# EAGLE board 4brar07_Audio_Amplifier (EAGLE 9.6.2)
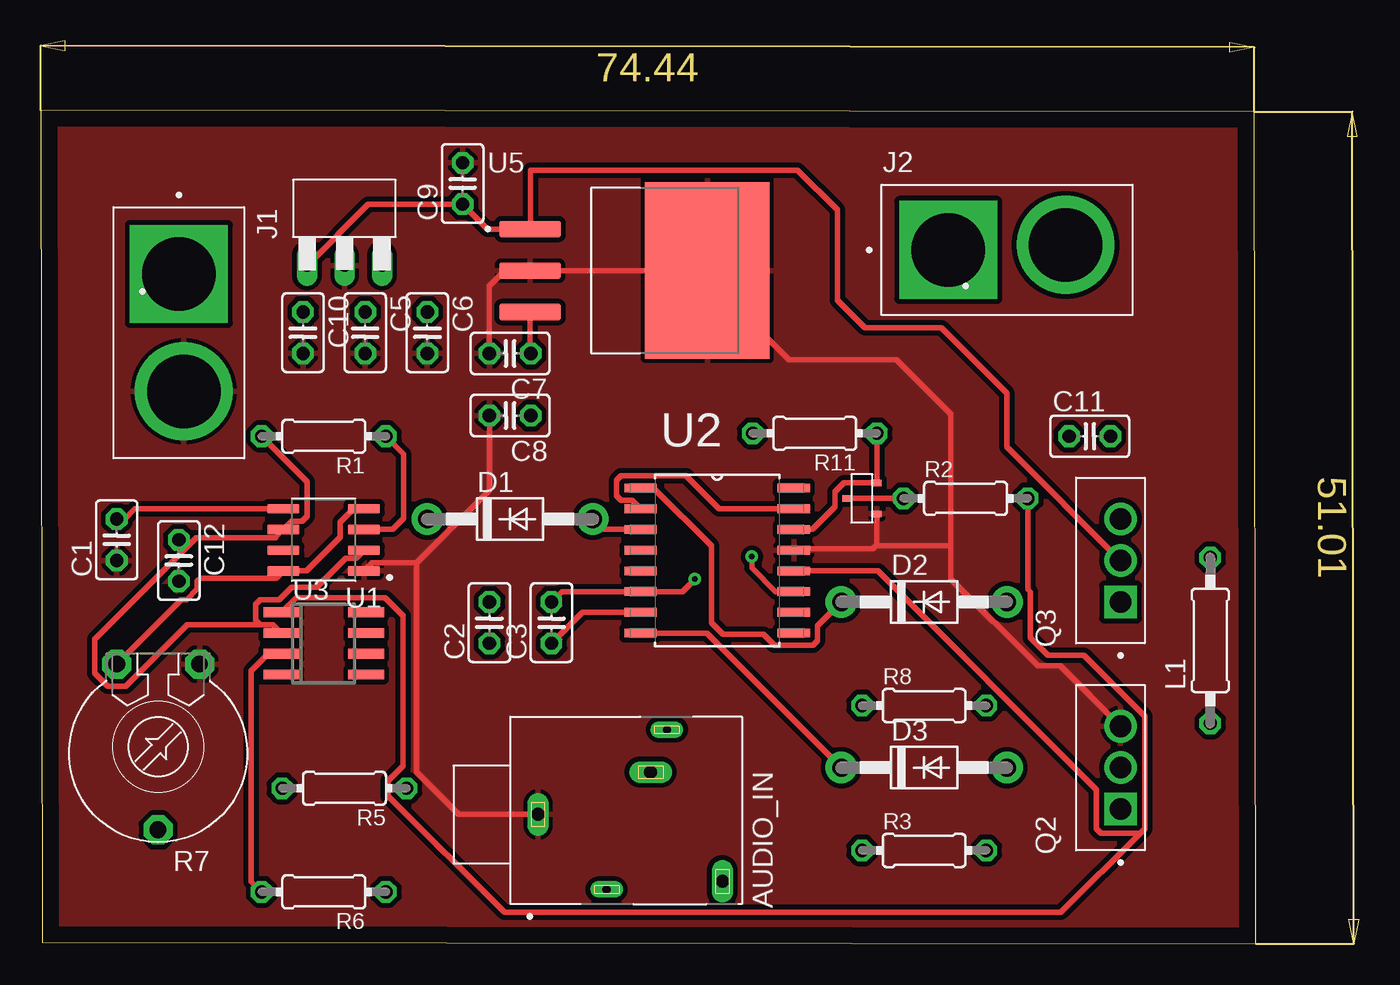
[diagram p0: board, top side]
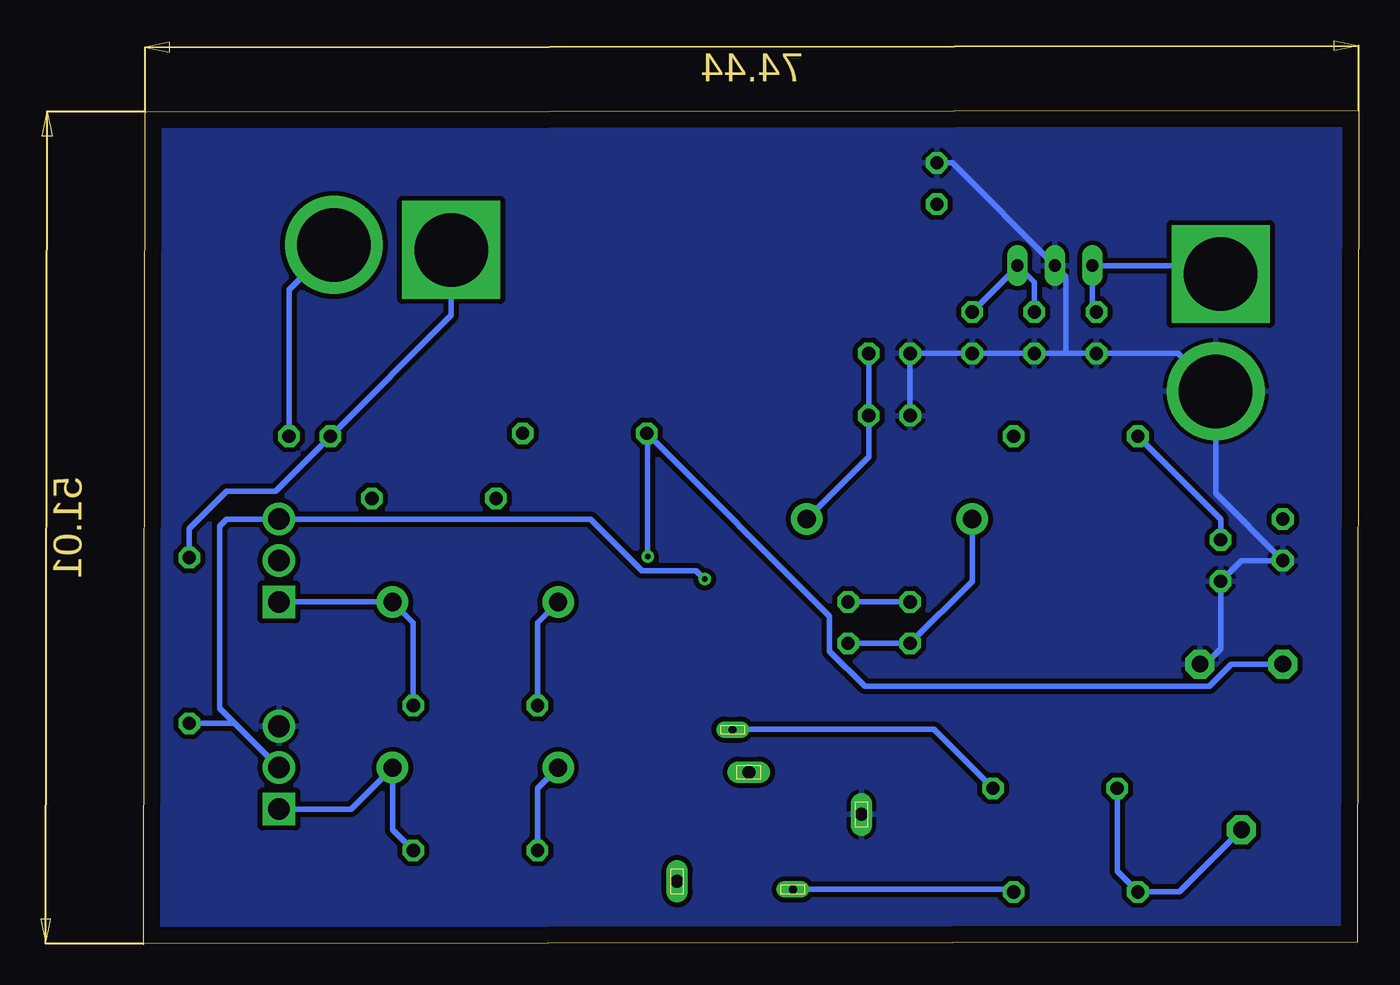
[diagram p1: board, bottom side, seen from below]

Size 74.54 x 51.11 mm. Coordinates in mm from the lower left corner, seen from the top.
Outline: 0.1,0.1 74.54,0 74.44,51.01 0,51.11 0.1,0.1
Copper layers (1*16): Top 0.035mm / dielectric 1.5mm / Bottom 0.035mm
Design rules "default *": minimum track width 6mil, minimum drill 0.25mm, track to track 0.3mm, track to pad 0.3mm, pad to pad 0.3mm, via to via 0.3mm, smd to smd 0.3mm, copper to edge 40mil, drill to drill 6mil, minimum pad ring 10mil, minimum via ring 8mil, stop-mask expansion 4mil, vias tented up to drill 0mil, thermal gap 10mil
Net classes: 0 default: width 0.25 mm; 1 power: width 0.35 mm

## Footprints (pad centres in the part's own frame; a part is rotated, then mirrored left to right if it is on the bottom)
WENZHOU_PJ324M = drill 0.8 long: 1 0,5.4; 3 2.6,-1.5; 4 -4.1,-5.9 | drill 0.5 long: 2 5.2,-2.5; 5 -4.6,1.2
C025-025X050 = drill 0.813 octagon: 1 -1.27,0; 2 1.27,0
DO41-10 = drill 1.118 pad 1.93: A 5.08,0; C -5.08,0
AMASS_XT60PB-M = drill 4.5 pad 6 square: 1 -3.6,0 | drill 4.5 pad 6: 2 3.6,0.305
0207/10 = drill 0.813 octagon: 1 -5.08,0; 2 5.08,0
TO254P1067X483X2057-3 = drill 1.33 pad 2 square: 1 -2.54,-0.62 | drill 1.33 pad 2: 2 0,-0.62; 3 2.54,-0.62
0204/7 = drill 0.813 octagon: 1 -3.81,0; 2 3.81,0
PT-10 = drill 1.016 pad 1.778 octagon: 1 -2.54,-5.08; 2 2.54,-5.08; 3 0,5.08
KTC8050S = smd 0.4 x 0.55: B 0,0.925; C 0.949,-0.925; E -0.946,-0.921
TP7805Y3 = drill 0.74 long: 1 -2.3,-3.5; 2 0,-3.5; 3 2.3,-3.5
SOIC127P599X175-8N = smd 1.97 x 0.6: 1 -2.47,1.905; 2 -2.47,0.635; 3 -2.47,-0.635; 4 -2.47,-1.905; 5 2.47,-1.905; 6 2.47,-0.635; 7 2.47,0.635; 8 2.47,1.905
SOIC127P1032X265-16N = smd 1.981 x 0.533: 1 -4.699,4.445; 2 -4.699,3.175; 3 -4.699,1.905; 4 -4.699,0.635; 5 -4.699,-0.635; 6 -4.699,-1.905; 7 -4.699,-3.175; 8 -4.699,-4.445; 9 4.699,-4.445; 10 4.699,-3.175; 11 4.699,-1.905; 12 4.699,-0.635; 13 4.699,0.635; 14 4.699,1.905; 15 4.699,3.175; 16 4.699,4.445
SO08 = smd 0.6 x 2.2: 1 -1.905,-2.6; 2 -0.635,-2.6; 3 0.635,-2.6; 4 1.905,-2.6; 5 1.905,2.6; 6 0.635,2.6; 7 -0.635,2.6; 8 -1.905,2.6
TO254P1524X483-4N = smd 3.79 x 0.99: 1 -6.4,2.54; 2 -6.4,0; 3 -6.4,-2.54 | smd 7.62 x 10.84: 4 4.48,0

## Placement (x,y rotation side)
AUDIO_IN  PJ324M  [WENZHOU_PJ324M]  35.91,7.93 90 top
C1  [C025-025X050]  4.66,24.77 90 top
C2  [C025-025X050]  27.52,19.69 90 top
C3  [C025-025X050]  31.33,19.69 90 top
C5  [C025-025X050]  19.9,37.47 270 top
C6  [C025-025X050]  23.71,37.47 270 top
C7  [C025-025X050]  28.79,36.2 180 top
C8  [C025-025X050]  28.79,32.39 180 top
C9  [C025-025X050]  25.88,46.62 90 top
C10  [C025-025X050]  16.09,37.47 270 top
C11  [C025-025X050]  64.35,31.12 0 top
C12  [C025-025X050]  8.47,23.5 270 top
D1  1N4004  [DO41-10]  28.79,26.04 0 top
D2  1N4004  [DO41-10]  54.19,20.96 0 top
D3  1N4004  [DO41-10]  54.19,10.8 0 top
J1  XT60_YELLOW  [AMASS_XT60PB-M]  8.47,37.47 270 top
J2  XT60_YELLOW  [AMASS_XT60PB-M]  59.27,42.55 0 top
L1  [0207/10]  71.74,18.6 90 top
Q2  IRF640NPBF  [TO254P1067X483X2057-3]  65.62,10.8 90 top
Q3  IRF640NPBF  [TO254P1067X483X2057-3]  65.62,23.5 90 top
R1  [0204/7]  17.36,31.12 180 top
R2  [0204/7]  56.73,27.31 0 top
R3  [0204/7]  54.19,5.72 0 top
R5  [0204/7]  18.63,9.53 180 top
R6  [0204/7]  17.36,3.18 180 top
R7  [PT-10]  7.2,12.07 180 top
R8  [0204/7]  54.19,14.61 0 top
R11  [0204/7]  47.48,31.3 180 top
T1  KTC8050S  [KTC8050S]  50.38,27.31 90 top
TP7805Y3  TP7805Y3  [TP7805Y3]  18.63,45.09 0 top
U1  NE555DR  [SOIC127P599X175-8N]  17.36,24.77 180 top
U2  IR2110STRPBF  [SOIC127P1032X265-16N]  41.49,23.5 0 top
U3  LM358D  [SO08]  17.36,18.42 270 top
U5  LM7812S/NOPB  [TO254P1524X483-4N]  36.41,41.28 0 top

## Library data of the parts
AUDIO_IN = PJ324M; AVAILABILITY: Not in stock; CHECK_PRICES: https://www.snapeda.com/parts/PJ324M/Wenzhou+QingPu+Electronics+Co.Ltd/view-part/?ref=eda; DESCRIPTION: Headphone Stereo jack/Audio connector; MF: Wenzhou QingPu Electronics Co.Ltd; MP: PJ324M; PACKAGE: Package; PRICE: None; SNAPEDA_LINK: https://www.snapeda.com/parts/PJ324M/Wenzhou+QingPu+Electronics+Co.Ltd/view-part/?ref=snap
C1-C3 C5-C12 = rcl; SPICEPREFIX: C
D1-D3 = adafruit
J1 J2 = XT60_YELLOW; AVAILABILITY: Not in stock; CHECK_PRICES: https://www.snapeda.com/parts/XT60%20YELLOW/Pololu/view-part/?ref=eda; DESCRIPTION: Power connector; 65A; PIN: 2; Colour: yellow; MF: Pololu; MP: XT60 YELLOW; PACKAGE: None; PRICE: None; SNAPEDA_LINK: https://www.snapeda.com/parts/XT60%20YELLOW/Pololu/view-part/?ref=snap
L1 = rcl; SPICEPREFIX: L
Q2 Q3 = IRF640NPBF; AVAILABILITY: In Stock; CHECK_PRICES: https://www.snapeda.com/parts/IRF640NPBF/Infineon/view-part/?ref=eda; DESCRIPTION: MOSFET, Power,N-Ch,VDSS 200V,RDS(ON) 0.15Ohm,ID 18A,TO-220AB,PD 150W,VGS +/-20V | Infineon IRF640NPBF; MF: Infineon; MP: IRF640NPBF; PACKAGE: TO-220-3 Infineon; PRICE: None; SNAPEDA_LINK: https://www.snapeda.com/parts/IRF640NPBF/Infineon/view-part/?ref=snap
R1-R3 R5 R6 R8 R11 = rcl; SPICEPREFIX: R
R7 = rcl; SPICEMODEL: POT; SPICEPREFIX: X
T1 = KTC8050S
TP7805Y3 = TP7805Y3; TP7805Y3: TP7805Y3 (U4)
U1 = NE555DR; AVAILABILITY: In Stock; CHECK_PRICES: https://www.snapeda.com/parts/NE555DR/Texas+Instruments/view-part/?ref=eda; DESCRIPTION: Single Precision Timer; MF: Texas Instruments; MP: NE555DR; PACKAGE: SOIC-8 Texas Instruments; PRICE: None; SNAPEDA_LINK: https://www.snapeda.com/parts/NE555DR/Texas+Instruments/view-part/?ref=snap
U2 = IR2110STRPBF; AVAILABILITY: In Stock; CHECK_PRICES: https://www.snapeda.com/parts/IR2110STRPBF/Infineon/view-part/?ref=eda; DESCRIPTION: Half-Bridge Gate Driver IC Non-Inverting 16-SOIC; MF: Infineon; MP: IR2110STRPBF; PACKAGE: SOIC-16 International Rectifier; PRICE: None; SNAPEDA_LINK: https://www.snapeda.com/parts/IR2110STRPBF/Infineon/view-part/?ref=snap
U3 = linear
U5 = LM7812S_NOPB; AVAILABILITY: In Stock; CHECK_PRICES: https://www.snapeda.com/parts/LM7812S/NOPB/Texas+Instruments/view-part/?ref=eda; DESCRIPTION: 1.5-A, 30-V, linear voltage regulator; MF: Texas Instruments; MP: LM7812S/NOPB; PACKAGE: TO263-3 Texas Instruments; PRICE: None; SNAPEDA_LINK: https://www.snapeda.com/parts/LM7812S/NOPB/Texas+Instruments/view-part/?ref=snap

## Nets
6: C12.1 R1.2 U1.2 U1.6 U3.2
+5V [power]: R7.2 R11.2 U1.4 U1.8 U2.11
+12V [power]: C7.1 C8.1 D1.A U2.3 U5.3
GND [power]: AUDIO_IN.1 C1.1 C5.2 C6.2 C7.2 C8.2 C9.2 C10.2 C12.2 J1.2 Q2.3 R7.1 T1.E TP7805Y3.2 U1.1 U2.13 U5.2 U5.4
HIN: R2.2 U2.12 U3.1
HO: D3.C R3.1 U2.8
LIN: R11.1 T1.C U2.14
LO: D2.C R8.1 U2.1
N$1: C11.1 J2.1 L1.2
N$2: C11.2 J2.2
N$3: C5.1 C6.1 TP7805Y3.3
N$5: AUDIO_IN.2 R5.1
N$6: D2.A Q3.1 R8.2
N$7: D3.A Q2.1 R3.2
N$8: R1.1 U1.3
N$9: R5.2 R6.2 R7.3 U3.3
N$10: AUDIO_IN.5 R6.1
N$11: C1.2 U1.5
N$12: R2.1 T1.B
V+: U3.8
V-: U3.4
VB: C2.1 C3.1 D1.C U2.7
VIN [power]: C9.1 C10.1 J1.1 Q3.2 TP7805Y3.1 U5.1
VS: C2.2 C3.2 L1.1 Q2.2 Q3.3 U2.6
VSS [power]: U2.2 U2.15

## Tracks (layer width: path | path; a pad name or v marks a point on that pad's centre or on a via)
6
  Top 0.25: 14.39,24.91 U1.6
  Top 0.35: U1.6 15.38,25.9 16.03,25.9 16.35,26.22 16.35,28.32 R1.2 | U1.2 19.34,23.64 18.69,23.64 16.92,21.87 15.39,21.87 14.62,21.1 13.46,21.1 13.19,20.82 13.19,19.83 13.46,19.55 | 13.46,19.55 14.2,19.55 | 14.2,19.55 14.72,19.02 U3.2 14.26,19.55 14.2,19.55 | 13.46,19.55 8.99,19.55 5.22,15.79 4.09,15.79 3.3,16.59 3.3,18.66 9.54,24.91 14.39,24.91
  Bottom 0.35: C12.1 8.47,26.04 R1.2
+5V  (via drill 0.35)
  Top 0.35: U2.11 45.09,21.6 43.62,23.06 v43.62,23.74 | U1.4 19.19,26.68 18.37,25.86 18.37,24.94 16.3,22.87 U1.8 14.45,22.42 9.77,22.42 9.61,22.26 9.61,21.76 8.94,21.1 8.61,21.1 R7.2
  Bottom 0.35: R7.2 7.81,17.15 9.17,15.79 30.3,15.79 32.47,17.95 32.47,20.1 R11.2 43.62,31.25 v43.62,23.74
+12V
  Top 0.35: U5.3 30.01,36.25 C7.1 | D1.A 34.51,25.41 U2.3
  Bottom 0.35: D1.A 30.06,29.85 C8.1 C7.1
GND
  Top 0.35: C7.2 27.5,36.22 27.5,40.33 28.45,41.28 U5.2 40.44,41.28 | U2.13 46.25,24.21 51.04,24.21 51.3,24.47 | U5.4 40.44,41.28 | U1.1 20.33,23.36 23.07,23.36 | 23.07,23.36 27.52,27.81 C8.2 | T1.E 51.3,24.47 | 23.07,23.36 23.07,10.51 25.65,7.93 AUDIO_IN.1 | Q2.3 62.54,17.04 61.15,17.04 55.84,22.35 55.84,24.42 | 55.84,24.42 55.84,32.47 52.5,35.81 45.91,35.81 40.44,41.28 | 51.3,24.47 51.35,24.42 55.84,24.42
  Bottom 0.35: 17.97,36.2 C10.2 11.11,36.2 J1.2 8.78,27.62 C1.1 7.2,23.5 C12.2 8.47,18.1 9.42,17.15 R7.1 | 17.97,36.2 C5.2 C6.2 C7.2 C8.2 | 17.97,36.2 17.97,40.93 TP7805Y3.2 24.93,47.89 C9.2
  pour Top: 0.1,0.1 74.54,0.1 74.54,51.11 0.1,51.11
  pour Bottom: 0.1,0.1 0.1,51.11 74.54,51.11 74.54,0.1
HIN
  Top 0.35: 67.44,6.78 65.04,6.78 64.77,7.06 64.77,9.45 51.35,22.87 U2.12 | 67.44,6.78 67.71,7.06 67.71,13.95 63.98,17.69 61.78,17.69 60.71,18.76 60.71,21.56 60.54,21.73 R2.2 | 67.44,6.78 62.57,1.92 28.44,1.92 21.3,9.06 21.3,10 22.23,10.93 22.23,20.13 21.14,21.22 15.65,21.22 U3.1
HO
  Top 0.35: U2.8 40.86,19.05 D3.C
  Bottom 0.35: R3.1 50.38,9.53 D3.C
LIN
  Top 0.35: R11.1 51.29,28.76 51.3,28.78 T1.C 49.26,28.26 48.7,27.71 48.7,26.79 47.33,25.41 U2.14
LO
  Top 0.35: U2.1 37.59,27.95 41.14,24.4 41.14,19.69 41.86,18.97 44.34,18.97 45,18.31 47.38,18.31 47.66,18.59 47.66,19.51 D2.C
  Bottom 0.35: D2.C 50.38,19.69 R8.1
N$1
  Bottom 0.35: J2.1 55.67,38.53 C11.1 66.45,27.75 69.44,27.75 71.74,25.45 L1.2
N$2
  Bottom 0.35: J2.2 65.62,40.11 C11.2
N$3
  Bottom 0.35: C6.1 20.93,41.52 TP7805Y3.3 19.9,40.56 C5.1
N$5
  Bottom 0.35: R5.1 26.05,13.14 AUDIO_IN.2
N$6
  Bottom 0.35: R8.2 58,19.69 D2.A Q3.1
N$7
  Bottom 0.35: R3.2 59.27,6.99 D3.A 61.81,8.26 Q2.1
N$8
  Top 0.35: R1.1 22.26,30.03 22.26,26.08 21.59,25.41 U1.3
N$9
  Top 0.35: R6.2 12.92,3.81 12.92,16.75 13.96,17.79 U3.3
  Bottom 0.35: R7.3 11.01,3.18 R6.2 14.82,4.45 R5.2
N$10
  Bottom 0.35: AUDIO_IN.5 21.32,3.33 R6.1
N$11
  Top 0.35: C1.2 5.14,26.04 5.77,26.68 U1.5
N$12
  Top 0.35: T1.B R2.1
VB
  Top 0.35: C3.1 33.23,20.33 U2.7
  Bottom 0.35: C3.1 C2.1 23.71,22.23 D1.C
VIN
  Top 0.35: Q3.2 59.27,30.47 59.27,33.77 55.26,37.78 50.56,37.78 48.87,39.47 48.87,45 46.43,47.44 30.06,47.44 30.06,43.87 U5.1 27.41,43.82 C9.1 20.09,45.35 TP7805Y3.1
  Bottom 0.35: J1.1 8.99,41.59 TP7805Y3.1 16.33,38.98 C10.1
VS  (via drill 0.35)
  Top 0.35: C3.2 31.96,21.6 U2.6 39.36,21.6 v40.12,22.36
  Bottom 0.35: C2.2 C3.2 | L1.1 68.96,13.52 Q2.2 69.87,14.43 69.87,25.6 69.43,26.04 Q3.3 47.13,26.04 43.97,22.89 40.65,22.89 v40.12,22.36
VSS
  Top 0.35: U2.15 41.59,26.68 39.58,28.69 35.6,28.69 35.33,28.41 35.33,27.48 35.6,27.2 36.26,27.2 U2.2